# Altium PCB Motor_Pot_To_Borad_Connector_PCB.PcbDoc
Units mil, origin at the board's own origin, x right, y up, seen from the top; angles counter-clockwise.
Board outline 475 x 590 mil, 2 copper layers (Top Layer, Bottom Layer); 1 components, 5 nets, 12 pads, 0 vias.
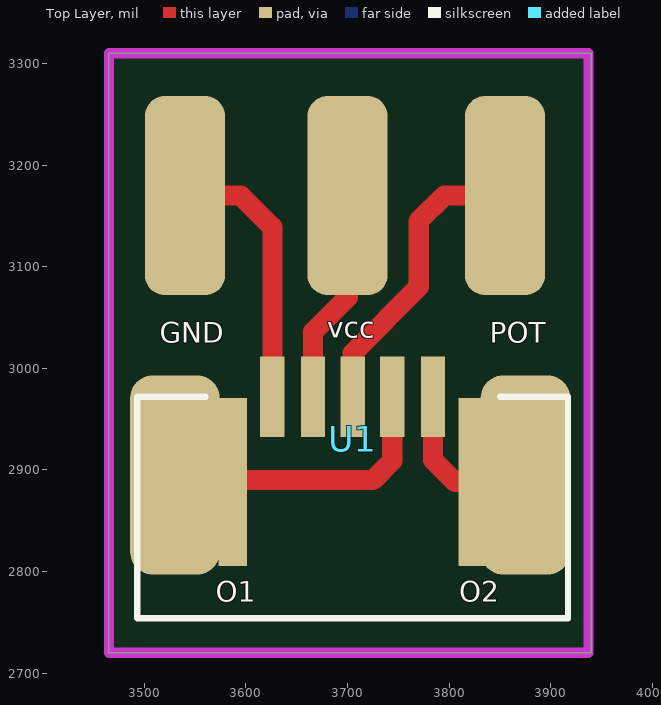
[diagram p0: Top Layer view]
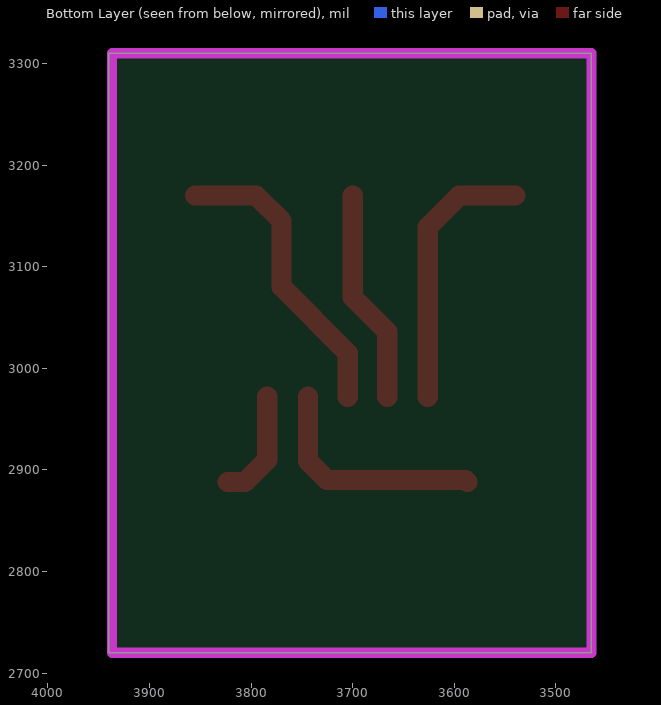
[diagram p1: Bottom Layer view, seen from below]

## Layer stack, top to bottom
Top Solder: solder mask 0.4, Solder Resist, Dk 3.5
Top Layer: signal copper 1.4
Dielectric 1: dielectric 12.6, FR-4, Dk 4.8
Bottom Layer: signal copper 1.4
Bottom Solder: solder mask 0.4, Solder Resist, Dk 3.5

## Board outline
3465,2720 3940,2720 3940,3310 3465,3310

## Design rules (kind name [scope] priority, off if disabled: settings)
Clearance [All] p1: gap=10
PolygonConnect [All] p1: connectstyle=Relief reliefconductorwidth=10 reliefentries=4 polygonreliefangle="90 Angle" airgapwidth=10
RoutingVias [All] p1: holewidth=28 width=50 viastyle="Through Hole" minholewidth=28 minwidth=50 maxholewidth=28 maxwidth=50
SolderMaskExpansion [All] p1: expansion=4
Width [All] p1: maxlimit=20 minlimit=10 preferedwidth=10
30 further rules are at their usual default settings.

## Components (designator, comment, footprint, x,y, rotation, side; value= is the part's Value field where it differs from the comment)
U1 "FFC/FPC CONNECTOR, RECEPTACLE, 5POS 1ROW" FCI_SFW5R-1STE1LF 3705,3080 r180 top

## Footprints (in the part's own frame and the unit in brackets; to place one, negate y for a bottom-side part, rotate by r counter-clockwise, add the part's x,y. Pads: shape width x height; smd on the part's side, far side on the other; paste and mask are expansions set on the pad)
FCI_SFW5R-1STE1LF [mil]
  rect 24x79 smd: 1(79,108) 2(39,108) 3(0,108) 4(-39,108) 5(-79,108)
  rect 28x165 smd: 6(-118,192) 7(118,192)
  silkscreen extent -212,108 212,326

## Part data
U1: library part SFW5R-1STE1LF

## Free pads (board coordinates)
  rrect50% 88x196 smd: 0(3530,2895) 0(3875,2895)
  rrect50% 79x196 smd: 0(3540,3170) 1(3700,3170) 2(3855,3170)

## Nets (pads, with @x,y where several pads share a name; then routed paths per layer and width w, separated by ;. In a path a pad name is that pad's centre, name@x,y a point inside that pad or via, vN(x,y) a via of type N, cw(c..) or ccw(c..) an arc to the next point about the centre after c; other vN are vias at no path point)
GND: pad.0@3540,3170 U1.1 | length 265.8
  Top Layer w20: pad.0@3540,3170 3595,3170 3626,3139 U1.1
OUT1: pad.0@3530,2895 U1.4 U1.7 | length 228.7
  Top Layer w20: U1.7 3589,2890 3725,2890 3744,2909 U1.4
OUT2: pad.0@3875,2895 U1.5 U1.6 | length 110.1
  Top Layer w20: U1.5 3784,2910 3806,2888 U1.6
POT: pad.2 U1.3 | length 295.3
  Top Layer w20: U1.3 3705,3015 3770,3080 3770,3145 3795,3170 pad.2
VCC: pad.1 U1.2 | length 212.1
  Top Layer w20: U1.2 3666,3036 3700,3070 pad.1

## Keep-outs
Keep-Out Layer:
  lines w10: 3465,2720 3937,2720 3937,3310 3465,3310 3465,2720

## Silkscreen, mask and mechanical layers (free items; w line width, h text height)
Top Overlay:
  text "vcc" at 3680,3030 h20
  text "GND" at 3515,3025 h20
  text "POT" at 3840,3025 h20
  text "O1" at 3570,2770 h20
  text "O2" at 3810,2770 h20